# EAGLE board Billy-Bass-Board v96 (EAGLE 9.7.0)
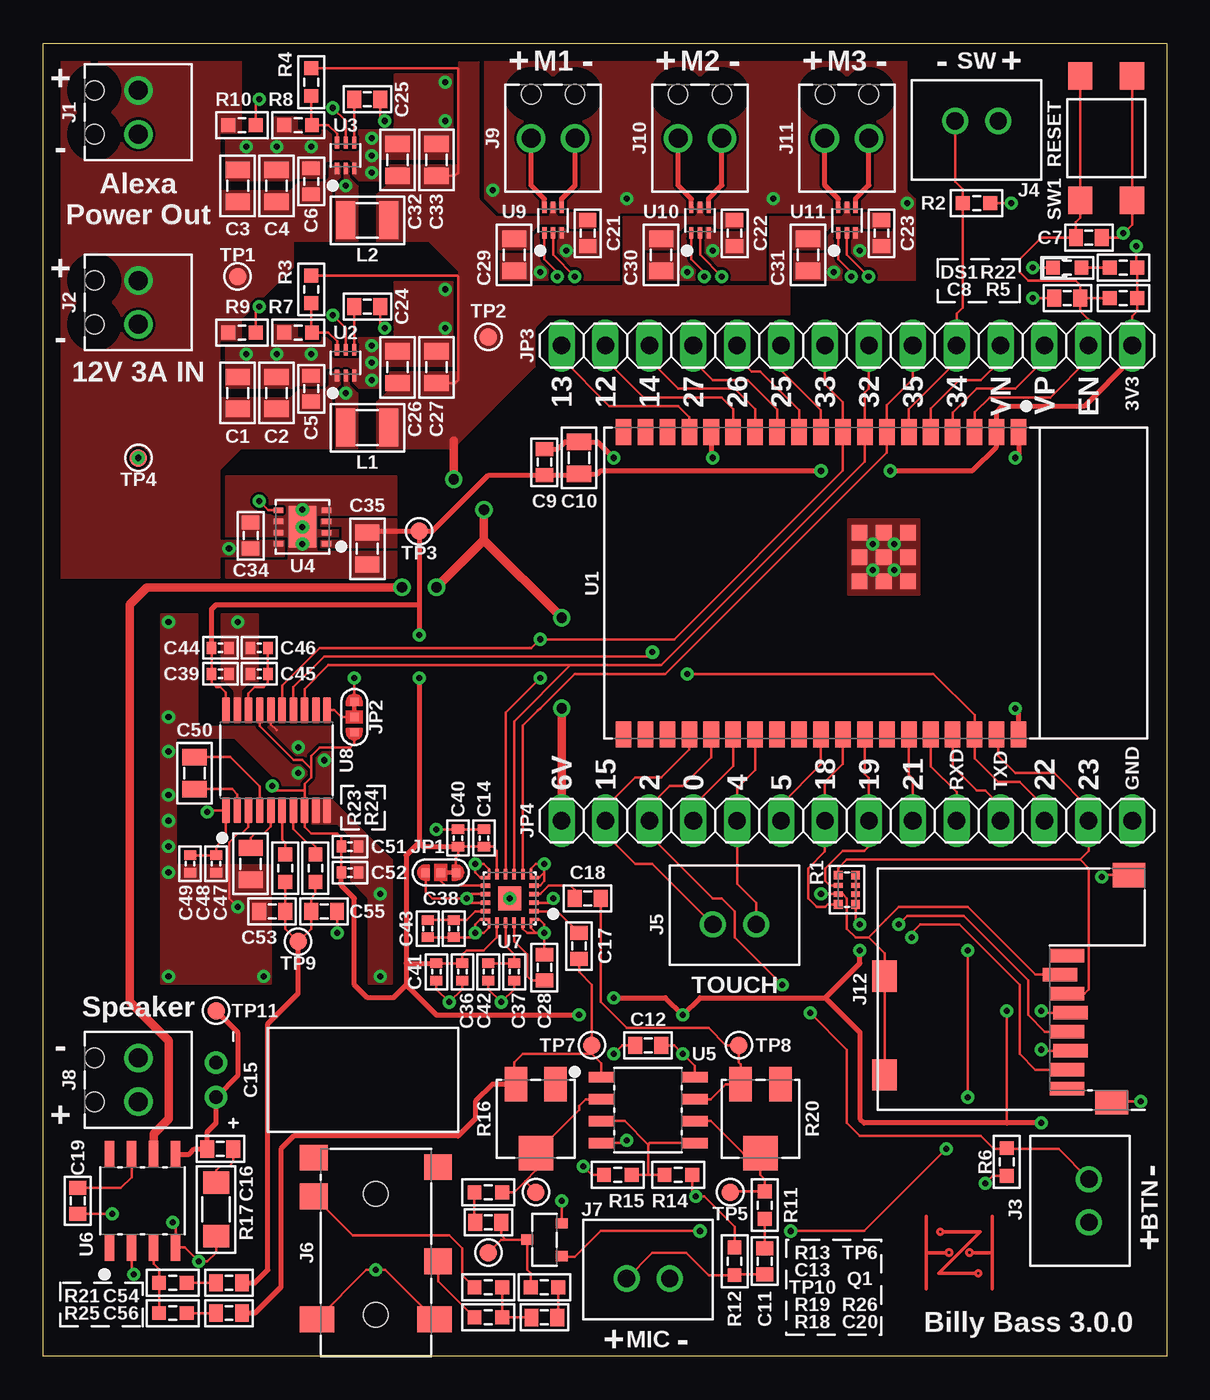
[diagram p0: board, top side]
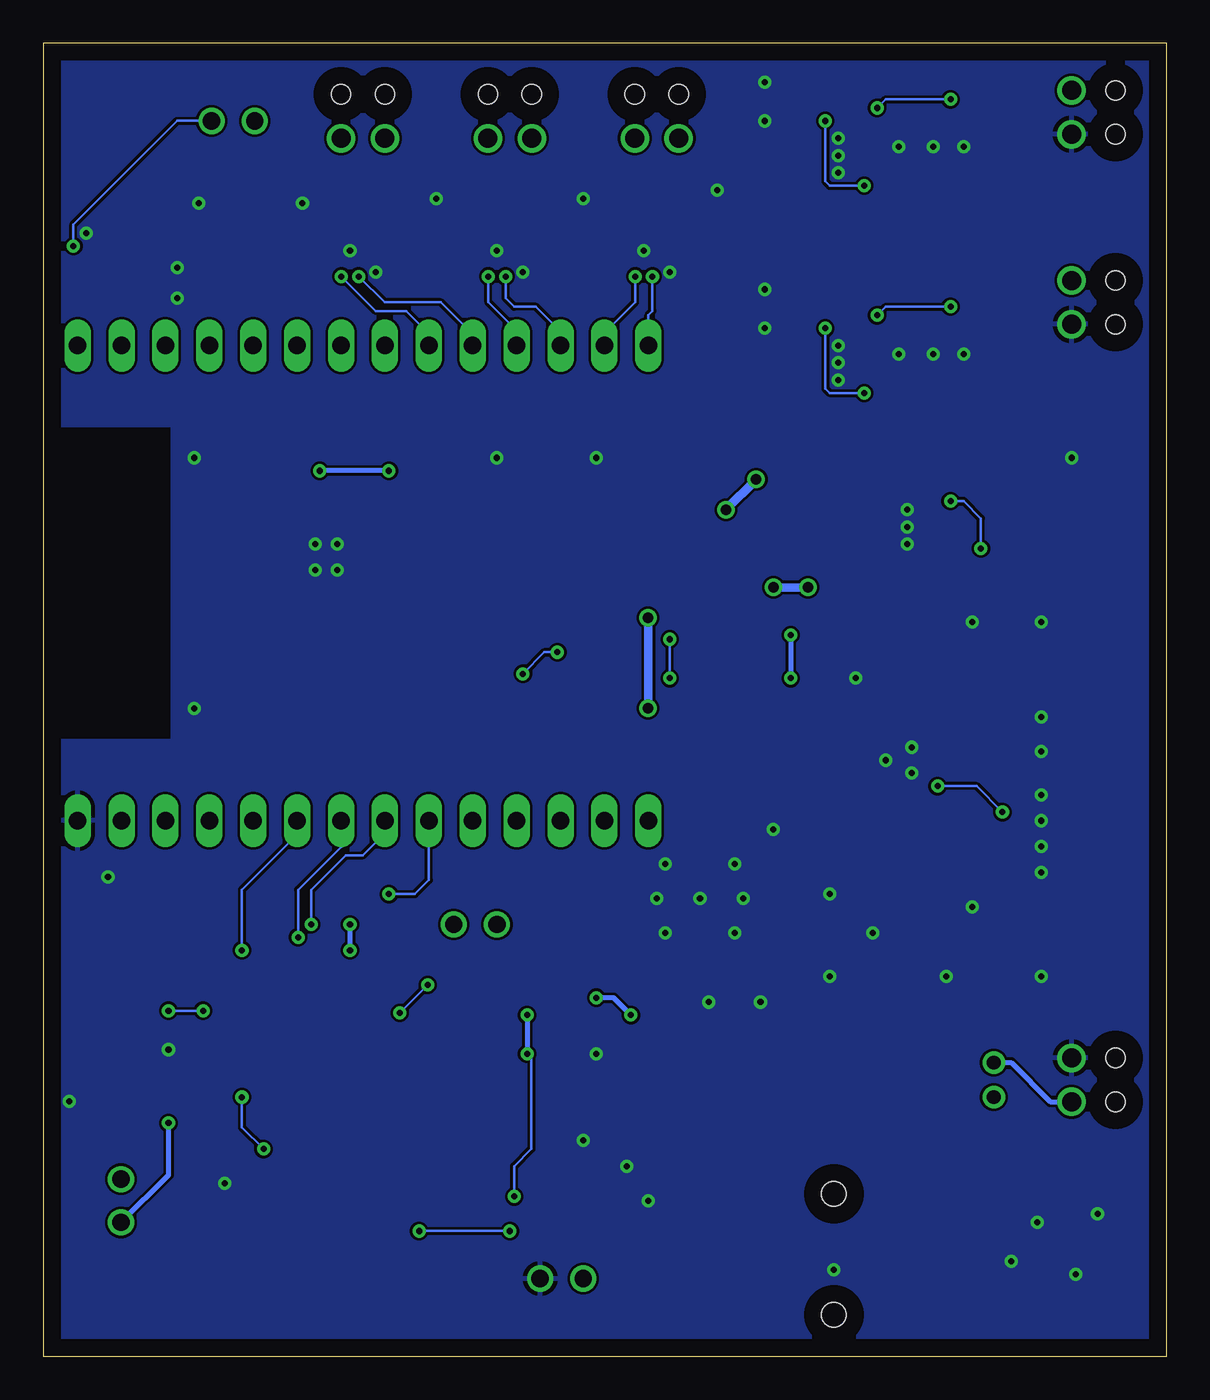
[diagram p1: board, bottom side, seen from below]

Size 65 x 76 mm. Coordinates in mm from the lower left corner, seen from the top.
Outline: 0,0 0,76 65,76 65,0 0,0
Copper layers (1*16): Top 0.035mm / dielectric 1.5mm / Bottom 0.035mm
Design rules "default": minimum track width 6mil, minimum drill 0.35mm, track to track 6mil, track to pad 6mil, pad to pad 6mil, via to via 6mil, smd to smd 6mil, copper to edge 40mil, drill to drill 6mil, minimum pad ring 10mil, minimum via ring 8mil, stop-mask expansion 4mil, vias tented up to drill 0mil, thermal gap 10mil

## Footprints (pad centres in the part's own frame; a part is rotated, then mirrored left to right if it is on the bottom)
2012-SEM = smd 0.95 x 1.4: 1 -0.925,0; 2 0.925,0
1608-SEM = smd 0.8 x 1: 1 -0.75,0; 2 0.75,0
1005-SEM = smd 0.55 x 0.7: 1 -0.5,0; 2 0.5,0
6X11-E-FLAT-REV = drill 0.8: 1 1,0; 2 -1,0
1608 = smd 0.8 x 0.8: 1 -0.825,0; 2 0.825,0
MPT-0.5/2-2.54 = drill 1.1: 1 0,1.27; 2 0,-1.27 | hole 1.1: -2.54,1.27; -2.54,-1.27
B2B-XH-A = drill 1: 1 -1.25,0; 2 1.25,0
SJ2-358940-SMT = smd 2 x 1.5: 1 -3.4,-2.15; 4 3.4,-2.15 | smd 1.6 x 1.5: 2 3.6,-9.25; 3 -3.6,-5.5; 10 3.6,-11.5; 11 -3.6,-10.95 | hole 1.4: 0,-2.4; 0,-9.4
MEM2061 = smd 0.8 x 2: 1 1.94,-3.225; 2 0.84,-2.825; 3 -0.26,-3.225; 4 -1.36,-3.425; 5 -2.46,-3.225; 6 -3.56,-3.425; 7 -4.66,-3.225; 8 -5.76,-3.225 | smd 1.8 x 1.4: CD@1 -4.95,7.325; CD@2 0.75,7.325 | smd 1.4 x 1.9: SHIELD@1 -6.55,-5.825; SHIELD@2 6.6,-6.825
JUMPER-PAD-2-BRIDGED-1 = smd 0.5 x 0.5: 1 -0.875,0; 2 0,0; 3 0.875,0
1X14 = drill 1.016 long: 1 -16.51,0; 2 -13.97,0; 3 -11.43,0; 4 -8.89,0; 5 -6.35,0; 6 -3.81,0; 7 -1.27,0; 8 1.27,0; 9 3.81,0; 10 6.35,0; 11 8.89,0; 12 11.43,0; 13 13.97,0; 14 16.51,0
2520-SEM = smd 1.1 x 2.2: 1 -1.25,0; 2 1.25,0
SOT-23-3 = smd 0.6 x 0.7: 1 0.95,1; 2 -0.95,1; 3 0,-1
2010-4P-SEM = smd 0.5 x 0.5: 1 -0.85,0.5; 2 -0.85,-0.5; 7 0.85,0.5; 8 0.85,-0.5 | smd 0.3 x 0.5: 3 -0.25,0.5; 4 -0.25,-0.5; 5 0.25,0.5; 6 0.25,-0.5
1608-SEM' = smd 0.8 x 0.8: 1 -0.8,0; 2 0.8,0
3314J = smd 1.3 x 2: 1 -1.15,2; 3 1.15,2 | smd 2 x 2: 2 0,-2
3216-SEM = smd 1.3 x 1.5: 1 -1.55,0; 2 1.55,0
TL3305 = smd 1.6 x 1.4: 1 -3.6,-1.5; 2 3.6,-1.5; 3 -3.6,1.5; 4 3.6,1.5
TEST-POINT = smd 1 x 1: TP 0,0
ESP32-WROVER-E/IE = smd 1.5 x 0.9: 1 -8.75,11.43; 2 -8.75,10.16; 3 -8.75,8.89; 4 -8.75,7.62; 5 -8.75,6.35; 6 -8.75,5.08; 7 -8.75,3.81; 8 -8.75,2.54; 9 -8.75,1.27; 10 -8.75,0; 11 -8.75,-1.27; 12 -8.75,-2.54; 13 -8.75,-3.81; 14 -8.75,-5.08; 15 -8.75,-6.35; 16 -8.75,-7.62; 17 -8.75,-8.89; 18 -8.75,-10.16; 19 -8.75,-11.43; 20 8.75,-11.43; 21 8.75,-10.16; 22 8.75,-8.89; 23 8.75,-7.62; 24 8.75,-6.35; 25 8.75,-5.08; 26 8.75,-3.81; 27 8.75,-2.54; 28 8.75,-1.27; 29 8.75,0; 30 8.75,1.27; 31 8.75,2.54; 32 8.75,3.81; 33 8.75,5.08; 34 8.75,6.35; 35 8.75,7.62; 36 8.75,8.89; 37 8.75,10.16; 38 8.75,11.43 | smd 0.9 x 0.9: PAD@1 -2.9,5.03; PAD@2 -1.5,5.03; PAD@3 -0.1,5.03; PAD@4 -2.9,3.63; PAD@5 -1.5,3.63; PAD@6 -0.1,3.63; PAD@7 -2.9,2.23; PAD@8 -1.5,2.23; PAD@9 -0.1,2.23
SOT563 = smd 0.67 x 0.3: 1 -0.74,0.5; 2 -0.74,0; 3 -0.74,-0.5; 4 0.74,-0.5; 5 0.74,0; 6 0.74,0.5
VSON = smd 0.6 x 0.31: 1 -1.4,0.975; 2 -1.4,0.325; 3 -1.4,-0.325; 4 -1.4,-0.975; 5 1.4,-0.975; 6 1.4,-0.325; 7 1.4,0.325; 8 1.4,0.975 | smd 1.65 x 2.4: PAD 0,0
D0008A-SOIC = smd 1.55 x 0.6: 1 -2.7,1.905; 2 -2.7,0.635; 3 -2.7,-0.635; 4 -2.7,-1.905; 5 2.7,-1.905; 6 2.7,-0.635; 7 2.7,0.635; 8 2.7,1.905
WQFN = smd 0.6 x 0.25: 1 -1.4,0.75; 2 -1.4,0.25; 3 -1.4,-0.25; 4 -1.4,-0.75; 11 1.4,-0.75; 12 1.4,-0.25; 13 1.4,0.25; 14 1.4,0.75 | smd 0.575 x 0.175: 5@1 -1.413,-1.212; 10@2 1.413,-1.212; 15@1 1.413,1.212; 20@2 -1.413,1.212 | smd 0.175 x 0.575: 5@2 -1.212,-1.413; 10@1 1.212,-1.413; 15@2 1.212,1.413; 20@1 -1.212,1.413 | smd 0.25 x 0.6: 6 -0.75,-1.4; 7 -0.25,-1.4; 8 0.25,-1.4; 9 0.75,-1.4; 16 0.75,1.4; 17 0.25,1.4; 18 -0.25,1.4; 19 -0.75,1.4 | smd 1.4 x 1.4: PAD 0,0
TSSOP-20 = smd 1.5 x 0.45: 1 -2.9,2.925; 2 -2.9,2.275; 3 -2.9,1.625; 4 -2.9,0.975; 5 -2.9,0.325; 6 -2.9,-0.325; 7 -2.9,-0.975; 8 -2.9,-1.625; 9 -2.9,-2.275; 10 -2.9,-2.925; 11 2.9,-2.925; 12 2.9,-2.275; 13 2.9,-1.625; 14 2.9,-0.975; 15 2.9,-0.325; 16 2.9,0.325; 17 2.9,0.975; 18 2.9,1.625; 19 2.9,2.275; 20 2.9,2.925

## Placement (x,y rotation side)
C1  10µF ± 10%  [2012-SEM]  11.25,55.75 90 top
C2  10µF ± 10%  [2012-SEM]  13.5,55.75 90 top
C3  10µF ± 10%  [2012-SEM]  11.25,67.75 90 top
C4  10µF ± 10%  [2012-SEM]  13.5,67.75 90 top
C5  0.1µF ± 5%  [1608-SEM]  15.5,56 90 top
C6  0.1µF ± 5%  [1608-SEM]  15.5,68 90 top
C7  0.1µF ± 5%  [1608-SEM]  60.5,64.75 0 top
C8  1.0µF ± 10%  [1608-SEM]  59.25,61.25 180 top
C9  0.1µF ± 5%  [1608-SEM]  29,51.75 90 top
C10  22µF ± 20%  [2012-SEM]  31,52 90 top
C11  1.0µF ± 10%  [1608-SEM]  41.75,5.5 90 top
C12  0.1µF ± 5%  [1608-SEM]  35,18 180 top
C13  1.0µF ± 10%  [1608-SEM]  25.75,7.75 180 top
C14  0.1µF ± 5%  [1005-SEM]  25.5,30 90 top
C15  220µF ± 20%  [6X11-E-FLAT-REV]  10,16 270 top
C16  47nF ± 10%  [1608-SEM]  10.25,12 0 top
C17  1.0µF ± 10%  [1608-SEM]  31,23.75 90 top
C18  1.0µF ± 10%  [1608-SEM]  31.5,26.5 180 top
C19  1.0µF ± 10%  [1608-SEM]  2,9 270 top
C20  1.0µF ± 10%  [1608-SEM]  29,2.25 0 top
C21  0.1µF ± 5%  [1608-SEM]  31.5,65 270 top
C22  0.1µF ± 5%  [1608-SEM]  40,65 270 top
C23  0.1µF ± 5%  [1608-SEM]  48.5,65 270 top
C24  0.1µF ± 5%  [1608-SEM]  18.75,60.75 180 top
C25  0.1µF ± 5%  [1608-SEM]  18.75,72.75 180 top
C26  22µF ± 20%  [2012-SEM]  20.5,57.25 90 top
C27  22µF ± 20%  [2012-SEM]  22.75,57.25 90 top
C28  1.0µF ± 10%  [1608-SEM]  29,22.5 90 top
C29  22µF ± 20%  [2012-SEM]  27.25,63.75 270 top
C30  22µF ± 20%  [2012-SEM]  35.75,63.75 270 top
C31  22µF ± 20%  [2012-SEM]  44.25,63.75 270 top
C32  22µF ± 20%  [2012-SEM]  20.5,69.25 90 top
C33  22µF ± 20%  [2012-SEM]  22.75,69.25 90 top
C34  1.0µF ± 10%  [1608-SEM]  12,47.5 90 top
C35  2.2µF ± 10%  [2012-SEM]  18.75,46.75 270 top
C36  0.1µF ± 5%  [1005-SEM]  24.25,22.25 270 top
C37  0.1µF ± 5%  [1005-SEM]  27.25,22.25 270 top
C38  0.1µF ± 5%  [1005-SEM]  23.75,24.75 270 top
C39  0.1µF ± 5%  [1005-SEM]  10.25,39.5 0 top
C40  10µF ± 5%  [1005-SEM]  24,30 90 top
C41  10µF ± 5%  [1005-SEM]  22.75,22.25 270 top
C42  10µF ± 5%  [1005-SEM]  25.75,22.25 270 top
C43  10µF ± 5%  [1005-SEM]  22.25,24.75 270 top
C44  10µF ± 5%  [1005-SEM]  10.25,41 0 top
C45  0.1µF ± 5%  [1005-SEM]  12.5,39.5 180 top
C46  10µF ± 5%  [1005-SEM]  12.5,41 180 top
C47  2.2µF ± 10%  [2012-SEM]  12,28.5 270 top
C48  0.1µF ± 5%  [1005-SEM]  10,28.5 270 top
C49  10µF ± 5%  [1005-SEM]  8.5,28.5 270 top
C50  2.2µF ± 10%  [2012-SEM]  8.75,33.75 270 top
C51  0.1µF ± 5%  [1005-SEM]  17.75,29.5 0 top
C52  10µF ± 5%  [1005-SEM]  17.75,28 0 top
C53  2.2nF ± 10%  [1608-SEM]  13.25,25.75 180 top
C54  1.0µF ± 10%  [1608-SEM]  10.75,4.25 180 top
C55  2.2nF ± 10%  [1608-SEM]  16.25,25.75 0 top
C56  1.0µF ± 10%  [1608-SEM]  10.75,2.5 180 top
DS1  Red  [1608]  59.25,63 0 top
J1  MPT-2-SCREW  [MPT-0.5/2-2.54]  5.5,72 0 top
J2  MPT-2-SCREW  [MPT-0.5/2-2.54]  5.5,61 0 top
J3  JST-XH-2  [B2B-XH-A]  60.5,9 90 top
J4  JST-XH-2  [B2B-XH-A]  54.01,71.5 180 top
J5  JST-XH-2  [B2B-XH-A]  40,25 0 top
J6  3.5MM-JACK-4-TIP  [SJ2-358940-SMT]  19.25,0 180 top
J7  JST-XH-2  [B2B-XH-A]  35,4.5 0 top
J8  MPT-2-SCREW  [MPT-0.5/2-2.54]  5.5,16 0 top
J9  MPT-2-SCREW  [MPT-0.5/2-2.54]  29.5,70.5 270 top
J10  MPT-2-SCREW  [MPT-0.5/2-2.54]  38,70.5 270 top
J11  MPT-2-SCREW  [MPT-0.5/2-2.54]  46.5,70.5 270 top
J12  MICRO-SD  [MEM2061]  56,21.25 90 top
JP1  JUMPER-2-BRIDGED-1  [JUMPER-PAD-2-BRIDGED-1]  23,28 180 top
JP2  JUMPER-2-BRIDGED-1  [JUMPER-PAD-2-BRIDGED-1]  18,37 270 top
JP3  [1X14]  46.5,58.5 180 top
JP4  [1X14]  46.5,31 0 top
L1  4.7µH ± 20%  [2520-SEM]  18.75,53.75 180 top
L2  4.7µH ± 20%  [2520-SEM]  18.75,65.75 180 top
Q1  BC817  [SOT-23-3]  29,6.75 270 top
R1  4x10kΩ ± 5%  [2010-4P-SEM]  46.5,27 270 top
R2  10kΩ ± 1%  [1608-SEM']  54,66.75 0 top
R3  64.2kΩ ± 1%  [1608-SEM']  15.5,61.75 90 top
R4  64.2kΩ ± 1%  [1608-SEM']  15.5,73.75 90 top
R5  10kΩ ± 1%  [1608-SEM']  62.5,61.25 180 top
R6  10kΩ ± 1%  [1608-SEM']  55.75,11.25 270 top
R7  10kΩ ± 1%  [1608-SEM']  14.75,59.25 180 top
R8  10kΩ ± 1%  [1608-SEM']  14.75,71.25 180 top
R9  10kΩ ± 1%  [1608-SEM']  11.5,59.25 180 top
R10  10kΩ ± 1%  [1608-SEM']  11.5,71.25 180 top
R11  1kΩ ± 1%  [1608-SEM']  41.75,8.75 90 top
R12  10kΩ ± 1%  [1608-SEM']  40,5.5 270 top
R13  1kΩ ± 1%  [1608-SEM']  25.75,9.5 0 top
R14  10kΩ ± 1%  [1608-SEM']  36.75,10.5 180 top
R15  10kΩ ± 1%  [1608-SEM']  33.25,10.5 180 top
R16  100kΩ  [3314J]  28.5,13.75 0 top
R17  10Ω ± 1%  [3216-SEM]  10,8.5 270 top
R18  3.3kΩ ± 1%  [1608-SEM']  25.75,2.25 0 top
R19  3.3kΩ ± 1%  [1608-SEM']  25.75,4 0 top
R20  100kΩ  [3314J]  41.5,13.75 0 top
R21  10kΩ ± 1%  [1608-SEM']  7.5,4.25 180 top
R22  1kΩ ± 1%  [1608-SEM']  62.5,63 180 top
R23  470Ω ± 1%  [1608-SEM']  14,28.25 270 top
R24  470Ω ± 1%  [1608-SEM']  15.75,28.25 270 top
R25  10kΩ ± 1%  [1608-SEM']  7.5,2.5 180 top
R26  1kΩ ± 1%  [1608-SEM']  29,4 180 top
SW1  TL3305  [TL3305]  61.5,70.5 270 top
TP1  TEST-POINT  [TEST-POINT]  11.25,62.5 0 top
TP2  TEST-POINT  [TEST-POINT]  25.75,59 0 top
TP3  TEST-POINT  [TEST-POINT]  21.75,47.75 180 top
TP4  TEST-POINT  [TEST-POINT]  5.5,52 180 top
TP5  TEST-POINT  [TEST-POINT]  39.75,9.5 180 top
TP6  TEST-POINT  [TEST-POINT]  28.5,9.5 180 top
TP7  TEST-POINT  [TEST-POINT]  31.75,18 0 top
TP8  TEST-POINT  [TEST-POINT]  40.25,18 0 top
TP9  TEST-POINT  [TEST-POINT]  14.75,24 180 top
TP10  TEST-POINT  [TEST-POINT]  25.75,6 180 top
TP11  TEST-POINT  [TEST-POINT]  10,20 90 top
U1  ESP32-WROVER-E/IE  [ESP32-WROVER-E/IE]  45,44.75 270 top
U2  TPS562202  [SOT563]  17.5,57.5 90 top
U3  TPS562202  [SOT563]  17.5,69.5 90 top
U4  TLV767-Q1-3.3V  [VSON]  15,48 180 top
U5  LM358B  [D0008A-SOIC]  35,14.25 0 top
U6  LM386M-1  [D0008A-SOIC]  5.75,9 90 top
U7  PCM1821-Q1  [WQFN]  27,26.5 180 top
U8  PCM5102A  [TSSOP-20]  13.5,34.5 90 top
U9  DRV8210  [SOT563]  29.5,65.75 90 top
U10  DRV8210  [SOT563]  38,65.75 90 top
U11  DRV8210  [SOT563]  46.5,65.75 90 top
U$122  SIGNATURE  [SIGNATURE]  53,6 0 top

## Library data of the parts
C1-C4 = Harrington-Capacitors; SIZE: 2012; TEMPERATURE: X7R; VOLTAGE: 16V
C5-C9 C11-C13 C16-C25 C28 C34 C53-C56 = Harrington-Capacitors; SIZE: 1608; TEMPERATURE: X7R; VOLTAGE: 50V
C10 C26 C27 C29-C33 = Harrington-Capacitors; SIZE: 2012; TEMPERATURE: X5R; VOLTAGE: 25V
C14 C36-C39 C45 C48 C51 = Harrington-Capacitors; SIZE: 1005; TEMPERATURE: X5R; VOLTAGE: 25V
C15 = Harrington-Capacitors; SIZE: 6x11mm; TEMPERATURE: JakeC; VOLTAGE: 25V
C35 C47 C50 = Harrington-Capacitors; SIZE: 2012; TEMPERATURE: X7R; VOLTAGE: 25V
C40-C44 C46 C49 C52 = Harrington-Capacitors; SIZE: 1005; TEMPERATURE: X5R; VOLTAGE: 10V
DS1 = Harrington-Diodes; SIZE: 1608; TEMPERATURE: -40~85°C; VOLTAGE: 1.95~2.5V
J1-J12 JP1 JP2 = Harrington-Connectors
JP3 JP4 = pinhead
L1 L2 = Harrington-Inductors; CURRENT: 1.4A; SIZE: 2520; TEMPERATURE: -55~125℃
Q1 = Harrington-Transistors; IC_MAX: 500mA; POWER: 250mW; VCE_MAX: 45V
R1 = Harrington-Resistors; POWER: 1/16W; TEMPERATURE: -55~155°C; VOLTAGE: 25V
R2 R5-R10 R12 R14 R15 R21 R25 = Harrington-Resistors; POWER: 1/10W; TEMPERATURE: -55~155°C; VOLTAGE: 31.6V
R3 R4 = Harrington-Resistors; POWER: 1/10W; TEMPERATURE: -55~155°C; VOLTAGE: 50V
R11 R13 R22 R26 = Harrington-Resistors; POWER: 1/10W; TEMPERATURE: -55~155°C; VOLTAGE: 10V
R16 R20 = Harrington-Resistors
R17 = Harrington-Resistors; POWER: 1/4W; TEMPERATURE: -55~155°C; VOLTAGE: 1.58V
R18 R19 = Harrington-Resistors; POWER: 1/10W; TEMPERATURE: -55~155°C; VOLTAGE: 18.2V
R23 R24 = Harrington-Resistors; POWER: 1/10W; TEMPERATURE: -55~155°C; VOLTAGE: 6.85V
SW1 = Harrington-Switches; I_MAX: 50mA; V_MAX: 12V
TP1-TP11 = Harrington-Symbols
U1-U11 = Harrington-ICs
U$122 = Harrington-Aesthetics

## Nets
3.3V: C9.1 C10.1 C12.1 C14.1 C35.1 C36.1 C39.1 C40.1 C41.1 C44.1 C48.1 C49.1 C51.1 C52.1 J3.1 J4.1 J12.4 JP1.1 JP2.3 JP3.1 R1.1 R1.3 R1.5 R1.7 R5.1 R12.1 R14.1 R22.1 TP3.TP U1.2 U4.1 U4.3 U5.8 U7.9 U7.16 U8.1 U8.8 U8.17 U8.20
6.0V: C21.1 C22.1 C23.1 C26.1 C27.1 C29.1 C30.1 C31.1 C32.1 C33.1 JP4.1 L1.1 L2.1 R3.2 R4.2 TP2.TP U6.6 U9.5 U10.5 U11.5
12.0V: C1.1 C2.1 C3.1 C4.1 C5.1 C6.1 C34.1 J1.1 J2.1 R9.2 R10.2 TP1.TP U2.1 U3.1 U4.5 U4.8
AUX_LEFT: J6.2 R19.1
AUX_MIXED: C20.1 R18.2 R19.2
AUX_MUTE: C13.1 Q1.3 R26.2 TP10.TP
AUX_RIGHT: J6.3 R18.1
BUTTON-ESP32_IO2: J3.2 JP4.3 R6.1 U1.24
CP2102N_RXD-ESP32_TXD: JP4.11 U1.35
CP2102N_TXD-ESP32_RXD: JP4.10 U1.34
DAC_OUT: C53.1 C54.1 C55.1 R23.2 R24.2 TP9.TP
DRV82101_OUT1: J9.2 U9.6
DRV82101_OUT2: J9.1 U9.4
DRV82102_OUT1: J10.2 U10.6
DRV82102_OUT2: J10.1 U10.4
DRV82103_OUT1: J11.2 U11.6
DRV82103_OUT2: J11.1 U11.4
ESP32_EN: C7.1 C8.1 JP3.2 R5.2 SW1.1 SW1.2 U1.3
ESP32_IO0: JP4.4 U1.25
ESP32_SENSOR_VN: JP3.4 U1.5
ESP32_SENSOR_VP: JP3.3 U1.4
GND: C1.2 C2.2 C3.2 C4.2 C5.2 C6.2 C7.2 C8.2 C9.2 C10.2 C12.2 C14.2 C19.2 C21.2 C22.2 C23.2 C26.2 C27.2 C28.2 C29.2 C30.2 C31.2 C32.2 C33.2 C34.2 C35.2 C36.2 C37.2 C38.2 C39.2 C40.2 C41.2 C42.2 C43.2 C44.2 C45.2 C46.2 C47.2 C48.2 C49.2 C51.2 C52.2 C53.2 C55.2 DS1.1 J1.2 J2.2 J6.1 J6.4 J7.2 J8.1 J12.6 J12.SHIELD@1 J12.SHIELD@2 JP1.3 JP2.1 JP4.14 Q1.2 R2.2 R6.2 R7.2 R8.2 R15.2 R17.2 SW1.3 SW1.4 TP4.TP U1.1 U1.15 U1.38 U1.PAD@1 U1.PAD@2 U1.PAD@3 U1.PAD@4 U1.PAD@5 U1.PAD@6 U1.PAD@7 U1.PAD@8 U1.PAD@9 U2.3 U3.3 U4.2 U4.4 U4.6 U4.7 U4.PAD U5.4 U6.2 U6.4 U7.2 U7.4 U7.5@1 U7.5@2 U7.10@1 U7.10@2 U7.12 U7.13 U7.15@1 U7.15@2 U7.19 U7.20@1 U7.20@2 U7.PAD U8.3 U8.9 U8.10 U8.16 U8.19 U9.3 U10.3 U11.3
HEAD_IN1-ESP32_IO14: JP3.12 U1.13 U10.1
HEAD_IN2-ESP32_IO27: JP3.11 U1.12 U10.2
I2S_ADC-ESP32_IO35: JP3.6 U1.7 U7.6
I2S_BCLK-ESP32_IO32: JP3.7 U1.8 U7.7 U8.13
I2S_DAC-ESP32_IO22: JP4.12 U1.36 U8.14
I2S_LRCLK-ESP32_IO33: JP3.8 U1.9 U7.8 U8.15
LM358_IN1-: R13.2 R16.2 TP6.TP U5.2
LM358_IN2-: R11.2 R20.2 TP5.TP U5.6
LM358_IN+: R14.2 R15.1 U5.3 U5.5
LM358_OUT1: C17.1 C56.1 R16.1 TP7.TP U5.1
LM358_OUT2: C18.1 R20.1 TP8.TP U5.7
LM386M_BYPASS: C19.1 U6.7
LM386M_IN+: R21.2 R25.2 U6.3
LM386M_OUT: C15.1 C16.1 TP11.TP U6.5
MIC+: C11.1 J7.1 R12.2
MOUTH_IN1-ESP32_IO13: JP3.14 U1.16 U9.1
MOUTH_IN2-ESP32_IO12: JP3.13 U1.14 U9.2
MUTE-ESP32_IO21: JP4.9 Q1.1 U1.33
N$1: DS1.2 R22.2
N$2: C54.2 R21.1
N$3: JP1.2 U7.11
N$4: C13.2 R13.1
N$6: C20.2 R26.1
N$8: C56.2 R25.1
N$10: C11.2 R11.1
N$15: C16.2 R17.1
PCM1821_AREG: C37.1 C42.1 U7.17
PCM1821_DREG: C38.1 C43.1 U7.14
PCM1821_IN1P: C17.2 U7.1
PCM1821_IN2P: C18.2 U7.3
PCM1821_VREF: C28.1 U7.18
PCM5102A_CAPM: C50.1 U8.4
PCM5102A_CAPP: C50.2 U8.2
PCM5102A_FLT: JP2.2 U8.11
PCM5102A_LDOO: C45.1 C46.1 U8.18
PCM5102A_OUTL: R23.1 U8.6
PCM5102A_OUTR: R24.1 U8.7
PCM5102A_VNEG: C47.1 U8.5
SD_CLK-ESP32_IO18: J12.5 JP4.7 R1.8 U1.30
SD_CS-ESP32_IO5: J12.2 J12.CD@1 J12.CD@2 JP4.6 R1.6 U1.29
SD_MISO-ESP32_IO19: J12.7 JP4.8 R1.4 U1.31
SD_MOSI-ESP32_IO23: J12.3 JP4.13 R1.2 U1.37
SPEAKER+: C15.2 J8.2
SW-ESP32_IO34: J4.2 JP3.5 R2.1 U1.6
TAIL_IN1-ESP32_IO26: JP3.10 U1.11 U11.1
TAIL_IN2-ESP32_IO25: JP3.9 U1.10 U11.2
TOUCH1-ESP32_4: J5.2 JP4.5 U1.26
TOUCH2-ESP32_15: J5.1 JP4.2 U1.23
TPS5622021_BST: C24.2 U2.4
TPS5622021_EN: R9.1 U2.5
TPS5622021_FB: R3.1 R7.1 U2.6
TPS5622021_SW: C24.1 L1.2 U2.2
TPS5622022_BST: C25.2 U3.4
TPS5622022_EN: R10.1 U3.5
TPS5622022_FB: R4.1 R8.1 U3.6
TPS5622022_SW: C25.1 L2.2 U3.2

## Tracks (layer width: path | path; a pad name or v marks a point on that pad's centre or on a via)
3.3V  (via drill 0.35)
  Top 0.152: U7.9 26.25,29.25 26,29.5 C14.1 C40.1 24,29 23.88,28.88 JP1.1 | U7.16 26.25,24.25 25.5,23.5 24.5,23.5 24.25,23.25 C36.1 C41.1 | U8.20 10.57,38.42 10.25,38.75 10,38.75 9.75,39 C39.1 C44.1 | U8.17 12.53,36.48 14.5,34.5 15,34.5 15.5,34 | 15.5,34 15.5,33.5 15.12,33.12 15.12,32.75 | 15.12,32.75 U8.8 15.12,30.62 15.5,30.25 17,30.25 17.25,30 C51.1 C52.1 | C49.1 C48.1 10,29.5 10.57,30.07 U8.1 9.6,31.6 v9.5,31.5 | JP2.3 18,35.5 17.75,35.25 16,35.25 15.5,34.75 15.5,34 | R14.1 37.55,9.45 v37.75,9.25 38.25,9.25 40,7.5 R12.1 | C12.1 36.5,18 v37,17.5 37.7,16.8 U5.8 | v47.25,25 47,25.25 R1.7 R1.5 R1.3 R1.1 | JP3.1 63.01,60.21 63.3,60.5 R5.1 R22.1 63.25,63.05 v63.25,64.25 | 15.12,32.75 13.5,32.75 v13.25,33 | J12.4 57.86,19.89 v57.75,20 | v55.75,20 55.75,13.5
  Top 0.3: JP3.1 63.01,57.76 60.25,55 55.5,55 55.16,54.66 U1.2 55.16,52.66 53.75,51.25 v49,51.25 | v45,51.25 32.25,51.25 32.08,51.08 C10.1 30.93,51 C9.1 25.75,51 22.5,47.75 TP3.TP | C35.1 18.82,47.75 TP3.TP | TP3.TP 21.75,43.5 | 21.75,43.5 v21.75,41.75 | v21.75,39.25 21.75,29.75 | C44.1 9.75,43.25 10,43.5 21.75,43.5 | 21.75,29.75 22,29.5 C40.1 | 21.75,29.75 21,29 21,22.75 | 21,22.75 C41.1 | 21,22.75 21,21.5 | 21,21.5 20.25,20.75 18.75,20.75 18,21.5 18,26.5 17.25,27.25 C52.1 | 21,21.5 22.75,19.75 v31,19.75 | v33,20.75 36,20.75 v37,19.75 38,20.75 45.25,20.75 | 45.25,20.75 47.25,18.75 47.25,13.75 47.5,13.5 55.75,13.5 v57.75,13.5 | 45.25,20.75 47.25,22.75 v47.25,23.5
  Bottom 0.152: v37,17.5 36.75,17.25 36.75,12 37.75,11 v37.75,9.25 | v63.25,64.25 63.25,65.5 57.25,71.5 J4.1 | v9.5,31.5 11,33 v13.25,33 | v57.75,20 v55.75,20
  Bottom 0.3: v45,51.25 v49,51.25 | v21.75,41.75 v21.75,39.25 | v37,19.75 v37,17.5 | J3.1 57.75,10.5 v57.75,13.5 | v31,19.75 32,20.75 v33,20.75 | v47.25,23.5 v47.25,25
  pour Top (no thermals): 17.31,47.21 17.29,47.19 17.27,47.17 16.08,47.17 16.08,46.83 20.42,46.83 20.42,48.42 16.08,48.42 16.08,48.08 17.27,48.08 17.29,48.06 17.31,48.04 17.33,48.02 17.33,47.23
6.0V  (via drill 0.6)
  Top 0.152: C27.1 23.82,56.33 24,56.5 24,62.5 23.95,62.55 R3.2 | C33.1 23.82,68.33 24,68.5 24,74.5 23.95,74.55 R4.2
  Top 0.5: U6.6 6.38,12.88 7.25,13.75 7.25,18.25 5,20.5 5,43.5 6,44.5 v20.75,44.5 | v22.75,44.5 25.5,47.25 | 25.5,47.25 v25.5,49 | v30,42.75 25.5,47.25 | v30,37.5 v29.99,37.49 JP4.1 | v23.75,50.75 23.75,53
  Bottom 0.5: v20.75,44.5 v22.75,44.5 | v30,42.75 v30,37.5 | v25.5,49 v23.75,50.75
  pour Top (no thermals): 20.08,55.98 20.06,55.96 19.33,55.22 19.33,52.58 23.72,52.58 28.42,57.28 28.42,59.52 28.44,59.54 29.21,60.31 29.23,60.33 43.17,60.33 43.17,64.02 43.19,64.04 43.21,64.06 43.23,64.08 45.17,64.08 45.17,65.02 45.19,65.04 45.71,65.56 45.73,65.58 47.27,65.58 47.29,65.56 47.53,65.33 48.92,65.33 48.92,66.17 47.53,66.17 47.29,65.94 47.27,65.92 46.73,65.92 46.71,65.94 46.69,65.96 46.67,65.98 46.67,66.67 46.33,66.67 46.33,65.98 46.31,65.96 46.29,65.94 46.27,65.92 42.08,65.92 42.08,61.98 42.06,61.96 42.04,61.94 42.02,61.92 34.73,61.92 34.71,61.94 34.69,61.96 34.67,61.98 34.67,64.02 34.69,64.04 34.71,64.06 34.73,64.08 36.67,64.08 36.67,65.02 36.69,65.04 37.21,65.56 37.23,65.58 38.77,65.58 38.79,65.56 39.03,65.33 40.42,65.33 40.42,66.17 39.03,66.17 38.79,65.94 38.77,65.92 38.23,65.92 38.21,65.94 38.19,65.96 38.17,65.98 38.17,66.67 37.83,66.67 37.83,65.98 37.81,65.96 37.79,65.94 37.77,65.92 33.58,65.92 33.58,61.98 33.56,61.96 33.54,61.94 33.52,61.92 26.23,61.92 26.21,61.94 26.19,61.96 26.17,61.98 26.17,64.02 26.19,64.04 26.21,64.06 26.23,64.08 28.17,64.08 28.17,65.02 28.19,65.04 28.71,65.56 28.73,65.58 30.27,65.58 30.29,65.56 30.53,65.33 31.92,65.33 31.92,66.17 30.53,66.17 30.29,65.94 30.27,65.92 29.73,65.92 29.71,65.94 29.69,65.96 29.67,65.98 29.67,66.67 29.33,66.67 29.33,65.98 29.31,65.96 29.29,65.94 29.27,65.92 26.23,65.92 26.21,65.94 25.19,66.96 25.17,66.98 25.17,74.92 24.08,74.92 24.08,68.98 24.06,68.96 24.04,68.94 24.02,68.92 20.08,68.92 20.08,67.98 20.06,67.96 19.33,67.22 19.33,64.58 22.27,64.58 22.29,64.56 24.06,62.79 24.08,62.77 24.08,56.98 24.06,56.96 24.04,56.94 24.02,56.92 20.08,56.92
12.0V  (via drill 0.35)
  Top 0.152: U4.5 13.03,48.98 v12.5,49.5
  Bottom 0.152: v10.75,46.75 10.75,48.5 11.75,49.5 v12.5,49.5
  pour Top (no thermals): 10.21,70.81 10.23,70.83 11.42,70.83 11.42,76.42 -0.42,76.42 -0.42,45.08 10.17,45.08 10.17,46.27 10.19,46.29 10.21,46.31 10.23,46.33 13.92,46.33 13.92,47.17 10.23,47.17 10.21,47.19 10.19,47.21 10.17,47.23 10.17,51.27 10.19,51.29 11.46,52.56 11.48,52.58 16.67,52.58 16.67,55.77 16.69,55.79 17.17,56.28 17.17,56.92 16.58,56.92 16.58,56.23 16.56,56.21 16.29,55.94 16.27,55.92 14.78,55.92 14.29,55.44 14.27,55.42 10.23,55.42 10.21,55.44 10.19,55.46 10.17,55.48 10.17,58.77 10.19,58.79 10.21,58.81 10.23,58.83 11.42,58.83 11.42,60.02 11.44,60.04 14.42,63.03 14.42,64.52 14.44,64.54 14.46,64.56 14.48,64.58 16.67,64.58 16.67,67.77 16.69,67.79 17.17,68.28 17.17,68.92 16.58,68.92 16.58,68.23 16.56,68.21 16.29,67.94 16.27,67.92 14.78,67.92 14.29,67.44 14.27,67.42 10.23,67.42 10.21,67.44 10.19,67.46 10.17,67.48 10.17,70.77 10.19,70.79
AUX_LEFT
  Top 0.152: J6.2 17.9,7 23.5,7 24.25,6.25 24.25,4.7 R19.1
AUX_MIXED
  Top 0.152: R19.2 R18.2 C20.1
AUX_MUTE
  Top 0.152: R26.2 28.2,4.8 28,5 Q1.3 26.75,6.75 | 26.75,6.75 26.5,7 C13.1 | 26.75,6.75 26.5,6.75 TP10.TP
AUX_RIGHT
  Top 0.152: R18.1 22.85,4.35 J6.3
BUTTON-ESP32_IO2  (via drill 0.35)
  Top 0.152: U1.24 38.65,34.65 37,33 36.25,33 35.07,31.82 JP4.3 35.07,30.18 38.75,26.5 39.25,26.5 40,25.75 40,24.25 v42.75,21.5 | v44.38,19.88 46.5,17.75 46.5,13.5 47.25,12.75 54.25,12.75 55,12 55.75,12 | J3.2 58.75,12 55.75,12 | 55.75,12 R6.1
  Bottom 0.152: v44.38,19.88 v42.75,21.5
CP2102N_RXD-ESP32_TXD
  Top 0.152: U1.35 52.62,34.13 54,32.75 54.5,32.75 55.39,31.86 JP4.11
CP2102N_TXD-ESP32_RXD
  Top 0.152: U1.34 51.35,34.15 52.85,32.65 JP4.10
DAC_OUT
  Top 0.152: R23.2 C53.1 14,24.75 TP9.TP 15.5,24.75 C55.1 15.5,26.5 15.75,26.75 R24.2
  Top 0.3: C54.1 12.25,4.25 13,5 13,19.25 14.75,21 TP9.TP
DRV82101_OUT1
  Top 0.3: U9.6 29,67 28.23,67.77 J9.2
DRV82101_OUT2
  Top 0.3: U9.4 30,67 30.77,67.77 J9.1
DRV82102_OUT1
  Top 0.3: U10.6 37.5,67 36.73,67.77 J10.2
DRV82102_OUT2
  Top 0.3: U10.4 38.5,67 39.27,67.77 J10.1
DRV82103_OUT1
  Top 0.3: U11.6 46,67 45.23,67.77 J11.2
DRV82103_OUT2
  Top 0.3: U11.4 47,67 47.77,67.77 J11.1
ESP32_EN
  Top 0.152: U1.3 53.89,54.64 54.75,55.5 58.25,55.5 60.5,57.75 60.5,58.47 JP3.2 60.47,60.03 60,60.5 C8.1 | R5.2 C8.1 | C8.1 60,62 59.75,62.25 57,62.25 56.5,62.75 56.5,63.5 57.75,64.75 C7.1 59.75,65.65 60,65.9 SW1.2 SW1.1
ESP32_IO0
  Top 0.152: U1.25 39.92,34.17 37.61,31.86 JP4.4
ESP32_SENSOR_VN
  Top 0.152: U1.5 51.35,54.85 53,56.5 54.25,56.5 55.39,57.64 JP3.4
ESP32_SENSOR_VP
  Top 0.152: U1.4 52.62,54.62 54,56 56.25,56 57.93,57.68 JP3.3
GND  (via drill 0.35)
  Top 0.152: U7.15@2 25.79,24.79 25.5,24.5 v25,24.5 | U7.15@1 25.29,25.29 25,25 v25,24.5 | U7.10@2 25.29,27.71 25,28 v25,28.5 25.5,28.5 25.79,28.21 U7.10@1 | U7.5@2 28.21,28.21 28.5,28.5 v29,28.5 29,28 | U7.5@1 28.71,27.71 29,28 | U7.20@1 28.21,24.79 28.5,24.5 | 28.5,24.5 28,24.5 27.75,24.75 U7.19 | 28.5,24.5 v29,24.5 | U7.20@2 28.71,25.29 29,25 v29,24.5 | U7.13 24.75,26.25 v24.5,26.5 | U7.12 24.75,26.75 v24.5,26.5 | JP1.3 22.12,26.88 22.5,26.5 v24.5,26.5 | C28.2 v29,24.5 | C43.2 C38.2 24.75,24.25 v25,24.5 | C36.2 24.25,21.25 v23.5,20.5 22.75,21.25 C41.2 | C42.2 25.75,21.25 v26.5,20.5 27.25,21.25 C37.2 | U6.2 5.12,4.88 v5.25,4.75 | v7.5,7.75 7.66,7.59 U6.4 8.2,6.3 v9,5.5 9.5,5.5 10,6 R17.2 | C19.2 v4,8.25 | C55.2 v17,24.5 | JP2.1 v18,39.25 | U8.3 11.88,30.62 11.5,30.25 11.25,30.25 10.75,29.75 10.75,26.5 v11.25,26 | J6.1 19.8,5 v19.25,5 18.7,5 J6.4 | C12.2 33.5,18 v33,17.5 | U5.4 33.59,12.35 v33.75,12.5 | R15.2 31.75,10.5 v31.25,11 | U7.2 29.25,26.25 v29.5,26.5 | 29,28 29,27.5 28.75,27.25 U7.4 | C8.2 v57.25,61.25 | DS1.1 v57.25,63 | SW1.3 SW1.4 63,65.5 v62.5,65 62.25,64.75 C7.2 | R2.2 v56,66.75 | Q1.2 v30,9 | C14.2 C40.2 v22.75,30.5 | J12.6 57.81,17.69 v57.75,17.75 | J12.SHIELD@1 61.88,14.75 v63.5,14.75 | J12.SHIELD@2 61.35,27.85 v61.25,27.75 | R6.2 54.95,10.45 v54.5,10 | U8.16 13.18,36.58 13.5,36.25
  Top 0.3: U1.1 56.43,52.18 v56.25,52 | U1.15 38.65,52.1 v38.75,52 | U1.38 56.43,37.32 v56.25,37.5 | C9.2 29.75,52.5 30.18,52.92 C10.2 32.08,52.92 v33,52
  other vias: 27,26.5 14.75,33.75 14.75,35.25 16.25,34.5 19,58.5 19,57.5 19,56.5 15.5,58 11.75,58 13.5,58 19,69.5 19,70.5 19,68.5 15.5,70 13.5,70 11.75,70 15,47 15,48 15,49 30.25,64 47.25,64 38.75,64 7.25,35 7.25,32.5 12.75,22 7.25,22 7.25,28 7.25,29.5 7.25,31 7.25,37 7.25,42.5 11.25,42.5 19.5,26.75 19.5,22 48,47 48,45.5 49.25,45.5 49.25,47 28.75,62.75 37.25,62.75 45.75,62.75 33.75,67 42.25,67 50,66.75 26,67.5 5.5,52 23.25,73.75 23.25,71.5 23.25,59.5 23.25,61.75
  pour Top (rank 2, no thermals): 10.58,45.08 20.42,45.08 20.42,50.92 10.58,50.92
  pour Top (rank 3, no thermals): 13.31,58.46 13.29,58.44 13.27,58.42 10.58,58.42 10.58,56.08 19.42,56.08 19.42,57.27 19.44,57.29 19.46,57.31 19.48,57.33 23.67,57.33 23.67,62.17 20.33,62.17 20.33,58.98 20.31,58.96 20.29,58.94 20.27,58.92 14.73,58.92 14.71,58.94 14.69,58.96 14.67,58.98 14.67,59.67 13.33,59.67 13.33,58.48
  pour Top (rank 3, no thermals): 13.31,70.46 13.29,70.44 13.27,70.42 10.58,70.42 10.58,68.08 19.42,68.08 19.42,69.27 19.44,69.29 19.46,69.31 19.48,69.33 23.67,69.33 23.67,74.17 20.33,74.17 20.33,70.98 20.31,70.96 20.29,70.94 20.27,70.92 14.73,70.92 14.71,70.94 14.69,70.96 14.67,70.98 14.67,71.67 13.33,71.67 13.33,70.48
  pour Bottom (rank 2): -0.85,-0.85 65.85,-0.85 65.85,76.85 -0.85,76.85
  pour Top (no thermals): 16.67,32.58 16.67,36.42 8.98,36.42 8.96,36.44 8.94,36.46 8.92,36.48 8.92,42.92 6.83,42.92 6.83,21.58 13.17,21.58 13.17,28.42 7.73,28.42 7.71,28.44 7.69,28.46 7.67,28.48 7.67,35.77 7.69,35.79 7.71,35.81 7.73,35.83 11.02,35.83 11.04,35.81 14.28,32.58
  pour Top (no thermals): 11.06,38.54 11.08,38.52 11.08,36.83 11.42,36.83 11.42,38.52 11.44,38.54 11.96,39.06 11.98,39.08 12.42,39.08 12.42,42.92 10.33,42.92 10.33,39.08 10.52,39.08 10.54,39.06
  pour Top (no thermals): 18.81,26.54 18.83,26.52 18.83,21.58 20.17,21.58 20.17,28.72 16.72,32.17 15.58,32.17 15.58,30.83 17.02,30.83 17.04,30.81 17.81,30.04 17.83,30.02 17.83,27.53
  pour Top (rank 2, no thermals): 50.42,62.33 50.42,66.97 49.94,67.46 49.92,67.48 49.92,76.42 25.58,76.42 25.58,62.33
  pour Top (no thermals): 46.58,44.08 50.67,44.08 50.67,48.42 46.58,48.42
HEAD_IN1-ESP32_IO14  (via drill 0.35)
  Top 0.152: U1.13 41.19,54.81 40,56 36.75,56 35.07,57.68 JP3.12 | v38.25,62.5 38.25,62.75 37.5,63.5 U10.1
  Bottom 0.152: JP3.12 35.07,59.32 36.5,60.75 37.75,60.75 38.25,61.25 v38.25,62.5
HEAD_IN2-ESP32_IO27  (via drill 0.35)
  Top 0.152: U1.12 42.46,54.79 40.75,56.5 38.75,56.5 37.61,57.64 JP3.11 | U10.2 38,63.75 v39.25,62.5
  Bottom 0.152: JP3.11 37.61,59.36 39.25,61 v39.25,62.5
I2S_ADC-ESP32_IO35
  Top 0.152: JP3.6 50.31,56.56 48.81,55.06 U1.7 48.81,52.31 36,39.5 30.75,39.5 28.75,37.5 28.62,37.38 27.75,36.5 U7.6
I2S_BCLK-ESP32_IO32
  Top 0.152: JP3.7 47.77,56.02 47.54,55.79 U1.8 47.54,51.79 35.75,40 30.5,40 | U8.13 15.12,38.62 16.5,40 30.5,40 | U7.7 27.25,36.75 30.5,40
I2S_DAC-ESP32_IO22  (via drill 0.35)
  Top 0.152: JP4.12 57.93,31.82 56.5,33.25 55.25,33.25 53.89,34.61 U1.36 53.89,37.11 51.5,39.5 v37.25,39.5 | U8.14 14.47,38.73 16.25,40.5 35,40.5 v35.25,40.75
  Bottom 0.152: v35.25,40.75 36,40.75 v37.25,39.5
I2S_LRCLK-ESP32_IO33  (via drill 0.35)
  Top 0.152: JP3.8 45.23,56.27 46.27,55.23 U1.9 46.27,51.27 36.5,41.5 v28.75,41.5 28.25,41 16,41 13.82,38.83 U8.15 | U7.8 26.75,37.25 v28.75,39.25
  Bottom 0.152: v28.75,39.25 v28.75,41.5
LM358_IN1-
  Top 0.152: R13.2 27.25,9.5 27.88,10.12 | 27.88,10.12 28.5,10.75 R16.2 31,14.25 31,14.5 31.39,14.88 U5.2 | TP6.TP 27.88,10.12
LM358_IN2-
  Top 0.152: U5.6 38.63,13.62 40.5,11.75 R20.2 41.5,10.5 41.75,10.25 R11.2 39.8,9.55 TP5.TP
LM358_IN+
  Top 0.152: R14.2 35,10.5 | 35,10.5 R15.1 | 35,10.5 35,12.25 | 35,12.25 35.09,12.35 U5.5 | 35,12.25 33.63,13.62 U5.3
LM358_OUT1
  Top 0.152: U5.1 32.3,16.95 31.75,17.5 | 31.75,17.5 TP7.TP 31.75,21.5 31,22.25 C17.1 | 31.75,17.5 27.75,17.5 27.25,17 27.25,15.75
  Top 0.3: R16.1 27.25,15.75 26,15.75 25,14.75 25,13.75 24,12.75 14.5,12.75 13.75,12 13.75,4 12.25,2.5 C56.1
LM358_OUT2
  Top 0.152: U5.7 38.63,14.88 39.5,15.75 R20.1 40.35,16.9 40.25,17 TP8.TP 39.5,18 38.5,19 33.75,19 32.25,20.5 C18.1
LM386M_BYPASS
  Top 0.152: U6.7 5.12,10.37 4.5,9.75 C19.1
LM386M_IN+
  Top 0.152: R25.2 R21.2 6.7,5.05 6.38,5.37 U6.3
LM386M_OUT
  Top 0.3: U6.5 8.45,11.7 8.75,12 C16.1 9.5,13 10,13.5 C15.1 11.25,16.25 11.25,18.75 TP11.TP
MIC+
  Top 0.152: J7.1 35.25,6 37.2,6 38.5,4.7 R12.2 40.05,4.75 C11.1
MOUTH_IN1-ESP32_IO13  (via drill 0.35)
  Top 0.152: U1.16 37.38,54.37 36.75,55 32.75,55 29.99,57.76 JP3.14 | v29.75,62.5 29.75,62.75 29,63.5 U9.1
  Bottom 0.152: JP3.14 29.99,60.26 29.75,60.5 v29.75,62.5
MOUTH_IN2-ESP32_IO12  (via drill 0.35)
  Top 0.152: U1.14 39.92,54.83 39.25,55.5 34.75,55.5 32.53,57.72 JP3.13 | v30.75,62.5 29.5,63.75 U9.2
  Bottom 0.152: JP3.13 32.53,59.22 30.75,61 v30.75,62.5
MUTE-ESP32_IO21  (via drill 0.35)
  Top 0.152: U1.33 50.08,33.67 50.31,33.44 JP4.9 | v53.5,23.5 v53.5,15 | v52.25,12 47.5,7.25 v43.25,7.25 | v38,7.25 32.25,7.25 30.75,5.75 30.05,5.75 Q1.1
  Bottom 0.152: JP4.9 50.31,30.19 53.5,27 v53.5,23.5 | v53.5,15 53.5,13.25 v52.25,12 | v43.25,7.25 v38,7.25
N$1
  Top 0.152: R22.2 DS1.2
N$2
  Top 0.152: C54.2 R21.1
N$3
  Top 0.152: U7.11 23.25,27.25 23,27.5 JP1.2
N$4
  Top 0.152: C13.2 24.95,7.8 R13.1
N$6
  Top 0.152: C20.2 29.8,2.3 R26.1
N$8
  Top 0.152: C56.2 R25.1
N$10
  Top 0.152: C11.2 R11.1
N$15
  Top 0.152: R17.1 10,10.75 10.25,11 10.75,11 11,11.25 C16.2
PCM1821_AREG
  Top 0.152: U7.17 26.75,23.75 27.25,23.25 C37.1 C42.1
PCM1821_DREG
  Top 0.152: U7.14 25,25.75 24.5,25.25 C38.1 C43.1
PCM1821_IN1P
  Top 0.152: U7.1 29.75,25.75 C17.2
PCM1821_IN2P
  Top 0.152: U7.3 28.75,26.75 29.25,27.25 30.5,27.25 30.75,27 C18.2
PCM1821_VREF
  Top 0.152: U7.18 27.25,24 28,23.25 28,22 28.25,21.75 C28.1
PCM5102A_CAPM
  Top 0.152: C50.1 10.82,34.67 12.53,32.98 U8.4
PCM5102A_CAPP
  Top 0.152: U8.2 11.22,32.52 10.93,32.83 C50.2
PCM5102A_FLT
  Top 0.152: U8.11 16.85,37.4 17.25,37 JP2.2
PCM5102A_LDOO
  Top 0.152: U8.18 11.88,38.38 12.25,38.75 12.75,38.75 13,39 C45.1 C46.1
PCM5102A_OUTL
  Top 0.152: U8.6 13.82,29.93 14,29.75 R23.1
PCM5102A_OUTR
  Top 0.152: U8.7 14.47,30.52 15.25,29.75 15.5,29.75 15.75,29.5 R24.1
PCM5102A_VNEG
  Top 0.152: U8.5 13.18,30.68 12.75,30.25 12.25,30.25 12,30 C47.1
SD_CLK-ESP32_IO18  (via drill 0.35)
  Top 0.152: U1.30 46.27,34.27 45.23,33.23 JP4.7 45.23,29.23 44.25,28.25 44.25,26.5 44.75,26 45.25,26 45.4,26.15 R1.8 | v49.5,25 50,25.5 53.25,25.5 57,21.75 57,19.75 57.96,18.79 J12.5
  Bottom 0.152: v49.5,25 49.5,27 47.5,29 46.5,29 45.23,30.27 JP4.7
SD_CS-ESP32_IO5  (via drill 0.35)
  Top 0.152: U1.29 45,34.25 42.69,31.94 JP4.6 | v45,26.75 R1.6 46.25,26.75 46.5,26.5 46.5,24.75 47,24.25 47.75,24.25 | J12.CD@1 J12.CD@2 48.67,23.32 47.75,24.25 | 47.75,24.25 48.75,25.25 49.5,26 53.5,26 57.41,22.09 J12.2
  Bottom 0.152: v45,26.75 43.5,26.75 42.69,27.56 JP4.6
SD_MISO-ESP32_IO19  (via drill 0.35)
  Top 0.152: U1.31 47.54,33.71 47.77,33.48 JP4.8 47.77,29.52 47.5,29.25 46.25,29.25 45.25,28.25 45.25,27.5 45.5,27.25 R1.4 | v50.25,24.25 50.25,24.5 50.75,25 53,25 56.5,21.5 56.5,17.5 57.41,16.59 J12.7
  Bottom 0.152: JP4.8 47.77,29.48 50.25,27 v50.25,24.25
SD_MOSI-ESP32_IO23
  Top 0.152: U1.37 55.25,35.91 55.25,34.75 56.25,33.75 58.5,33.75 60.5,31.75 60.5,31.03 60.48,31.02 | 60.48,31.02 JP4.13 | R1.2 46,28.25 46.5,28.75 60,28.75 | 60,28.75 60.5,29.25 60.5,31 60.48,31.02 | J12.3 60.25,21 60.5,21.25 60.5,28.25 60,28.75
SPEAKER+
  Bottom 0.3: J8.2 6.73,14.73 9,17 C15.2
SW-ESP32_IO34
  Top 0.152: U1.6 50.08,54.83 52.85,57.6 JP3.5 52.85,60.35 53.2,60.7 R2.1 53.2,67.55 52.76,67.99 J4.2
TAIL_IN1-ESP32_IO26  (via drill 0.35)
  Top 0.152: U1.11 43.73,54.77 41.5,57 41,57 40.15,57.85 JP3.10 | v46.75,62.5 46.75,62.75 46,63.5 U11.1
  Bottom 0.152: JP3.10 40.15,59.15 42,61 45.25,61 v46.75,62.5
TAIL_IN2-ESP32_IO25  (via drill 0.35)
  Top 0.152: U1.10 45,54.75 42.69,57.06 JP3.9 | U11.2 46.5,63.75 v47.75,62.5
  Bottom 0.152: JP3.9 42.69,59.19 44,60.5 45.75,60.5 v47.75,62.5
TOUCH1-ESP32_4
  Top 0.152: U1.26 41.19,33.94 40.15,32.9 JP4.5 40.15,27.35 41.25,26.25 J5.2
TOUCH2-ESP32_15
  Top 0.152: U1.23 37.38,35.13 35.75,33.5 34.25,33.5 32.53,31.78 JP4.2 32.53,30.22 34.25,28.5 35.25,28.5 J5.1
TPS5622021_BST
  Top 0.152: U2.4 C24.2
TPS5622021_EN  (via drill 0.35)
  Top 0.152: U2.5 17.5,59.5 v16.75,60.25 | v12.5,60.75 12.3,60.55 R9.1
  Bottom 0.152: v16.75,60.25 16.25,60.75 v12.5,60.75
TPS5622021_FB
  Top 0.152: U2.6 17,58.75 16.5,59.25 R7.1 15.5,59.3 R3.1
TPS5622021_SW  (via drill 0.35)
  Top 0.152: C24.1 19.5,59.75 v19.75,59.5
  Bottom 0.152: v19.75,59.5 19.75,56 19.5,55.75 v17.5,55.75
  pour Top (rank 2, no thermals): 17.33,56.23 17.31,56.21 16.83,55.72 16.83,52.58 18.17,52.58 18.17,55.72 17.69,56.21 17.67,56.23 17.67,56.92 17.33,56.92
TPS5622022_BST
  Top 0.152: U3.4 C25.2
TPS5622022_EN  (via drill 0.35)
  Top 0.152: v12.5,72.75 12.3,72.55 R10.1 | U3.5 17.5,71.5 v16.75,72.25
  Bottom 0.152: v16.75,72.25 16.25,72.75 v12.5,72.75
TPS5622022_FB
  Top 0.152: U3.6 17,70.75 16.5,71.25 R8.1 15.5,71.3 R4.1
TPS5622022_SW  (via drill 0.35)
  Top 0.152: C25.1 19.5,71.75 v19.75,71.5
  Bottom 0.152: v19.75,71.5 19.75,68 19.5,67.75 v17.5,67.75
  pour Top (rank 2, no thermals): 17.33,68.23 17.31,68.21 16.83,67.72 16.83,64.58 18.17,64.58 18.17,67.72 17.69,68.21 17.67,68.23 17.67,68.92 17.33,68.92
(copper drawn outside any net)
  shapes: Bottom area x1

## Text on the board
tPlace: + | M1 | - | + | M2 | - | + | M3 | - | - | SW | + | + | RESET | - | Alexa / Power Out | + | - | 12V 3A IN | 13 | 12 | 14 | 27 | 26 | 25 | 33 | 32 | 35 | 34 | VN | VP | EN | 3V3 | 6V | 15 | 2 | 0 | 4 | 5 | 18 | 19 | 21 | RXD | TXD | 22 | 23 | GND | TOUCH | Speaker | - | + | - | BTN | + | Billy Bass 3.0.0 | + | MIC | -